# Altium PCB PCB2.PcbDoc
Units mil, origin at the board's own origin, x right, y up, seen from the top; angles counter-clockwise.
Board outline 5000 x 5000 mil, 2 copper layers (Top Layer, Bottom Layer); 97 components, 65 nets, 194 pads, 3 vias.
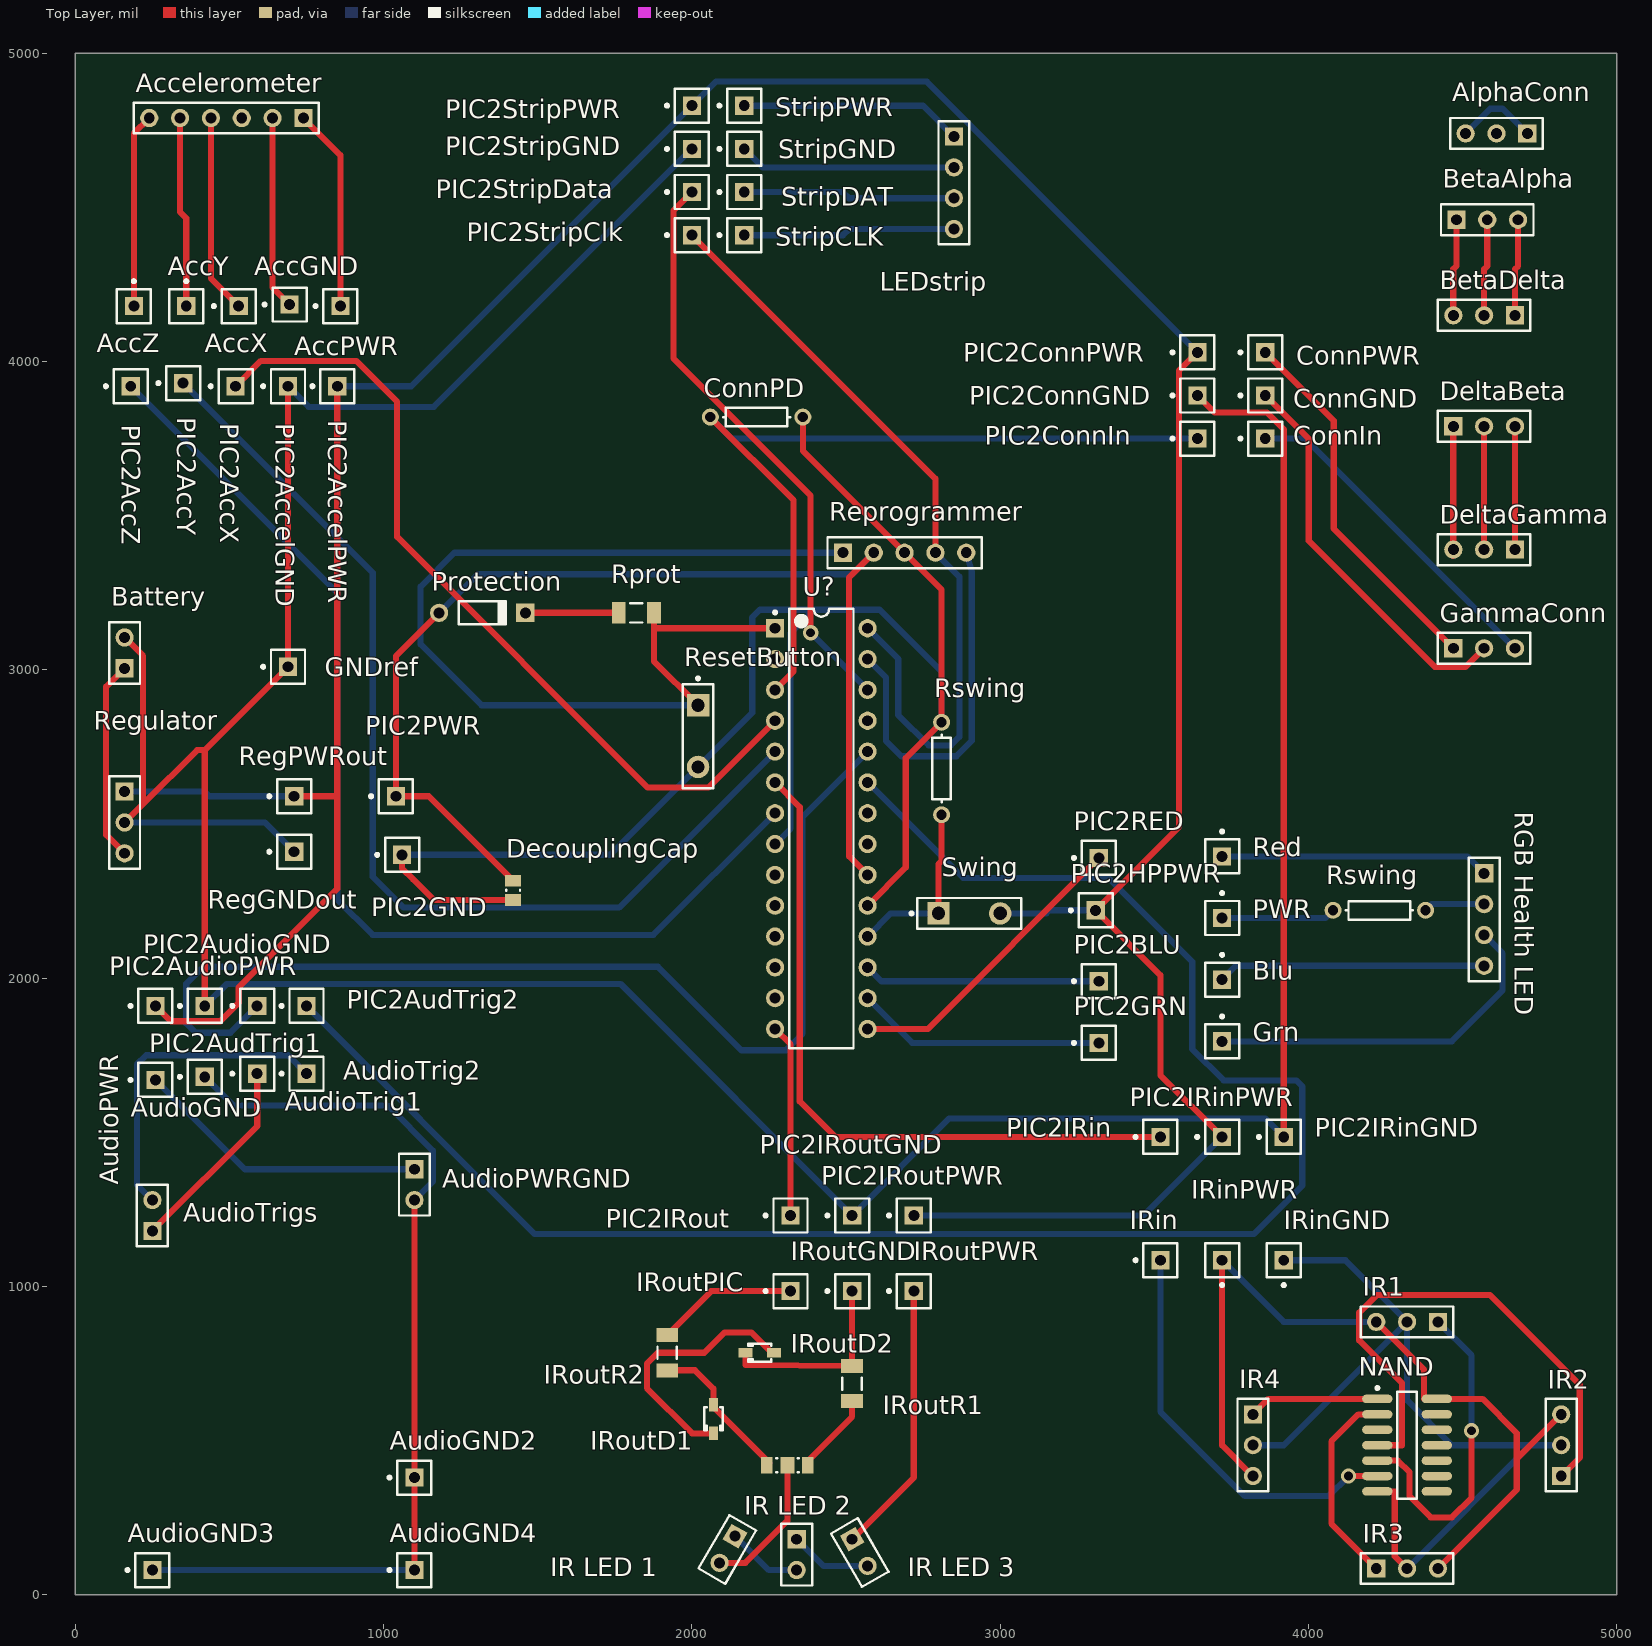
[diagram p0: Top Layer view]
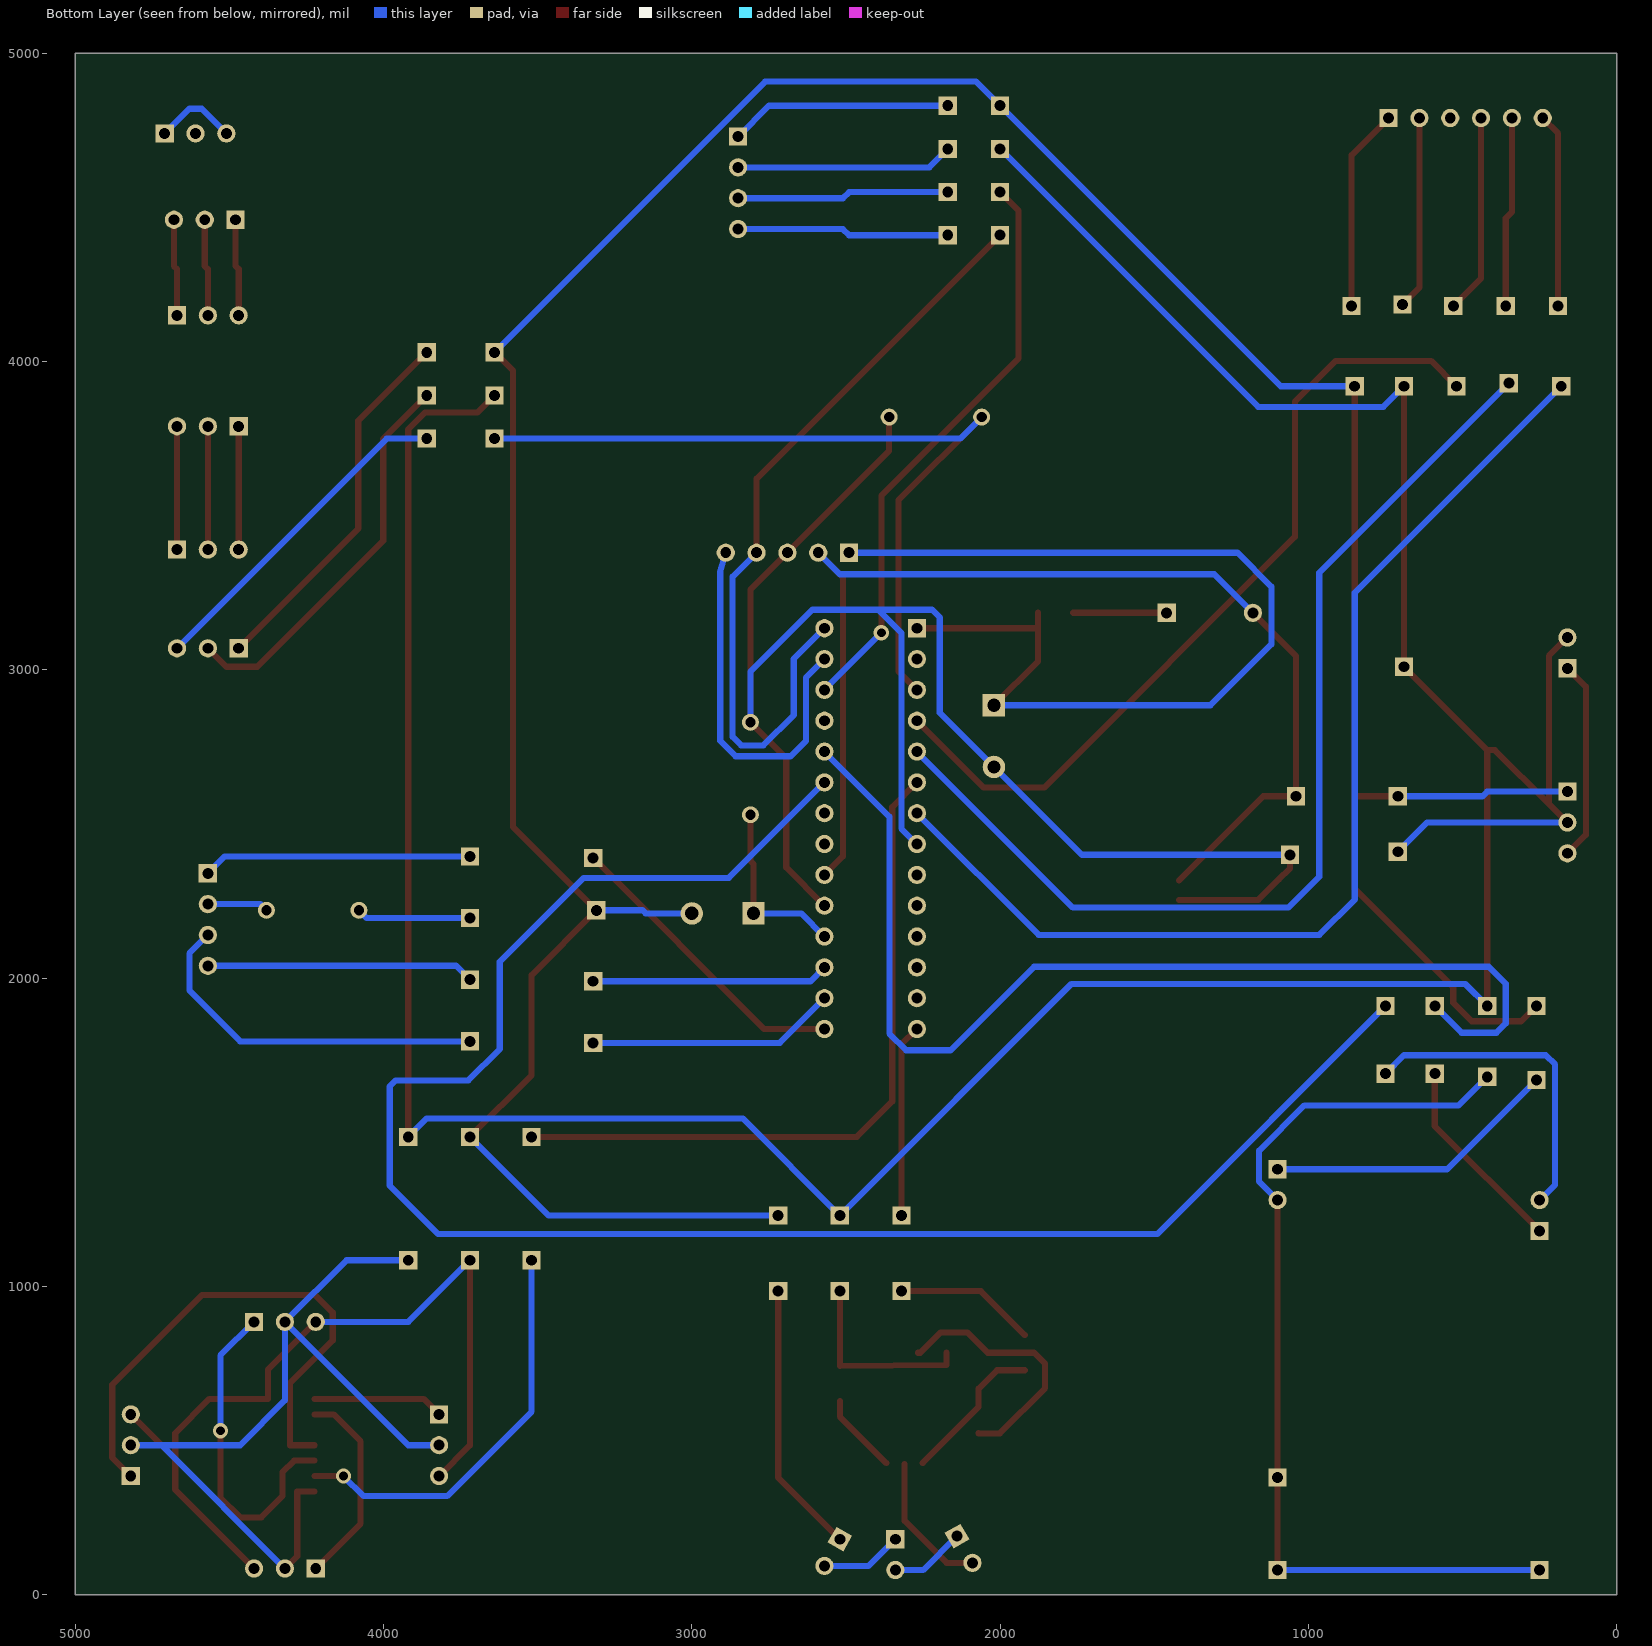
[diagram p1: Bottom Layer view, seen from below]

## Layer stack, top to bottom
Top Solder: solder mask 0.4, Solder Resist, Dk 3.5
Top Layer: signal copper 1.4
Dielectric 1: dielectric 12.6, FR-4, Dk 4.8
Bottom Layer: signal copper 1.4
Bottom Solder: solder mask 0.4, Solder Resist, Dk 3.5

## Board outline
0,0 0,5000 5000,5000 5000,0

## Design rules (kind name [scope] priority, off if disabled: settings)
Clearance [All] p1: gap=10
PolygonConnect [All] p1: connectstyle=Relief reliefconductorwidth=10 reliefentries=4 polygonreliefangle="90 Angle" airgapwidth=10
RoomDefinition Schematic [InComponentClass('Schematic')] p1: confinementstyle=ConfineIn formatcopy=TRUE lockcomponents=FALSE outline -2335,-1800 40290,-1800 40290,-250 -2335,-250
RoutingVias [All] p1: holewidth=28 width=50 viastyle="Through Hole" minholewidth=28 minwidth=50 maxholewidth=28 maxwidth=50
SolderMaskExpansion [All] p1: expansion=4
Width [All] p1: maxlimit=20 minlimit=20 preferedwidth=20
30 further rules are at their usual default settings.

## Components (designator, comment, footprint, x,y, rotation, side; value= is the part's Value field where it differs from the comment)
Accelerometer "Header 6" HDR1X6 740,4790 r180 top
AccGND "Plug" PIN1 695,4185 r90 top
AccPWR "Plug" PIN1 860,4180 r90 top
AccX "Plug" PIN1 530,4180 r90 top
AccY "Plug" PIN1 360,4180 r0 top
AccZ "Plug" PIN1 190,4180 r0 top
AlphaConn "Header 3" HDR1X3 4710,4740 r180 top
AudioGND "Plug" PIN1 420,1680 r90 top
AudioGND2 "Plug" PIN1 1100,380 r90 top
AudioGND3 "Plug" PIN1 250,80 r90 top
AudioGND4 "Plug" PIN1 1100,80 r90 top
AudioPWR "Plug" PIN1 260,1670 r90 top
AudioPWRGND "Header 2" HDR1X2 1100,1380 r270 top
AudioTrig1 "Plug" PIN1 590,1690 r90 top
AudioTrig2 "Plug" PIN1 750,1690 r90 top
AudioTrigs "Header 2" HDR1X2 250,1180 r90 top
Battery "Header 2" HDR1X2 160,3005 r90 top
BetaAlpha "Header 3" HDR1X3 4480,4460 r0 top
BetaDelta "Header 3" HDR1X3 4670,4150 r180 top
Blu "Plug" PIN1 3720,1995 r0 top
ConnGND "Plug" PIN1 3860,3890 r90 top
ConnIn "Plug" PIN1 3860,3750 r90 top
ConnPD "Res1" AXIAL-0.3 2210,3820 r180 top
ConnPWR "Plug" PIN1 3860,4030 r90 top
DecouplingCap "10uf" CAPC0805(2012)75_L 2345,420 r0 top
DecouplingCap "10uf" CAPC0805(2012)75_L 2275,420 r0 top
DecouplingCap "10uf" CAPC0805(2012)75_L 1420,2285 r270 top
DeltaBeta "Header 3" HDR1X3 4470,3790 r0 top
DeltaGamma "Header 3" HDR1X3 4670,3390 r180 top
GammaConn "Header 3" HDR1X3 4470,3070 r0 top
GNDref "Plug" PIN1 690,3010 r90 top
Grn "Plug" PIN1 3720,1795 r0 top
IR1 "Header 3" HDR1X3 4420,885 r180 top
IR2 "Header 3" HDR1X3 4820,385 r90 top
IR3 "Header 3" HDR1X3 4220,85 r0 top
IR4 "Header 3" HDR1X3 3820,585 r270 top
"IR LED 1" "Header 2" HDR1X2 2140,190 r240 top
"IR LED 2" "Header 2" HDR1X2 2340,180 r270 top
"IR LED 3" "Header 2" HDR1X2 2520,180 r300 top
IRin "Plug" PIN1 3520,1085 r90 top
IRinGND "Plug" PIN1 3920,1085 r180 top
IRinPWR "Plug" PIN1 3720,1085 r180 top
IRoutD1 "N4148" DIOD-SOD323-2_V 2070,570 r270 top
IRoutD2 "N4148" DIOD-SOD323-2_V 2220,785 r180 top
IRoutGND "Plug" PIN1 2520,985 r90 top
IRoutPIC "Plug" PIN1 2320,985 r90 top
IRoutPWR "Plug" PIN1 2720,985 r90 top
IRoutR1 "3.3 5% 1206(3216)" RESC1206(3216)_N 2520,685 r270 top
IRoutR2 "7.2K 5% 1206(3216)" RESC1206(3216)_N 1920,785 r90 top
LEDstrip "Header 4" HDR1X4 2850,4730 r270 top
NAND "SN74F20D" D014_M 4320,485 r0 top
PIC2AccelGND "Plug" PIN1 690,3920 r90 top
PIC2AccelPWR "Plug" PIN1 850,3920 r90 top
PIC2AccX "Plug" PIN1 520,3920 r90 top
PIC2AccY "Plug" PIN1 350,3930 r90 top
PIC2AccZ "Plug" PIN1 180,3920 r90 top
PIC2AudioGND "Plug" PIN1 420,1910 r90 top
PIC2AudioPWR "Plug" PIN1 260,1910 r90 top
PIC2AudTrig1 "Plug" PIN1 590,1910 r90 top
PIC2AudTrig2 "Plug" PIN1 750,1910 r90 top
PIC2BLU "Plug" PIN1 3320,1990 r90 top
PIC2ConnGND "Plug" PIN1 3640,3890 r90 top
PIC2ConnIn "Plug" PIN1 3640,3750 r90 top
PIC2ConnPWR "Plug" PIN1 3640,4030 r90 top
PIC2GND "Plug" PIN1 1060,2400 r90 top
PIC2GRN "Plug" PIN1 3320,1790 r90 top
PIC2HPPWR "Plug" PIN1 3310,2220 r90 top
PIC2IRin "Plug" PIN1 3520,1485 r90 top
PIC2IRinGND "Plug" PIN1 3920,1485 r90 top
PIC2IRinPWR "Plug" PIN1 3720,1485 r90 top
PIC2IRout "Plug" PIN1 2320,1230 r90 top
PIC2IRoutGND "Plug" PIN1 2520,1230 r90 top
PIC2IRoutPWR "Plug" PIN1 2720,1230 r90 top
PIC2PWR "Plug" PIN1 1040,2590 r90 top
PIC2RED "Plug" PIN1 3320,2390 r90 top
PIC2StripClk "Plug" PIN1 2000,4410 r90 top
PIC2StripData "Plug" PIN1 2000,4550 r90 top
PIC2StripGND "Plug" PIN1 2000,4690 r90 top
PIC2StripPWR "Plug" PIN1 2000,4830 r90 top
Protection "Diode 1N4148" DO-35 1320,3185 r0 top
PWR "Plug" PIN1 3720,2195 r0 top
Red "Plug" PIN1 3720,2395 r0 top
RegGNDout "Plug" PIN1 710,2410 r90 top
RegPWRout "Plug" PIN1 710,2590 r90 top
Regulator "Header 3" HDR1X3 160,2605 r270 top
Reprogrammer "Header 5" HDR1X5 2490,3380 r0 top
ResetButton "SW-SPST" SPST-2 2020,2785 r270 top
"RGB Health LED" "Header 4" HDR1X4 4570,2340 r270 top
Rprot "1K 5% 1206(3216)" RESC1206(3216)_N 1820,3185 r180 top
Rswing "Res1" AXIAL-0.3 4230,2220 r180 top
Rswing "Res1" AXIAL-0.3 2810,2680 r90 top
StripCLK "Plug" PIN1 2170,4410 r90 top
StripDAT "Plug" PIN1 2170,4550 r90 top
StripGND "Plug" PIN1 2170,4690 r90 top
StripPWR "Plug" PIN1 2170,4830 r90 top
Swing "SW-SPST" SPST-2 2900,2210 r0 top (schematic designator TriggerSwing)
U? "PIC16F1788SP" SPDIP300-SP28 2420,2485 r0 top

## Footprints (in the part's own frame and the unit in brackets; to place one, negate y for a bottom-side part, rotate by r counter-clockwise, add the part's x,y. Pads: shape width x height; smd on the part's side, far side on the other; paste and mask are expansions set on the pad)
AXIAL-0.3 [mm] "Axial Device, Thru-Hole; 2 Leads; 0.3 in Pin Spacing"
  round 1.4 hole 0.85: 1(-3.81,0) 2(3.81,0)
  silkscreen extent -2.77,-0.76 2.77,0.76
CAPC0805(2012)75_L [mm] "Chip Capacitor, Body 2.0x1.2mm, Height 0.75mm, IPC High Density"
  rect 0.95x1.35 smd: 1(-0.8,0) 2(0.8,0)
  silkscreen extent -0.05,-0.58 0.05,0.58, body extent -1.1,-0.72 1.1,0.72, height 0.75
D014_M [mm] "SOIC, 14-Leads, Body 8.7x3.9mm, Pitch 1.27mm, IPC Low Density"
  oval 2.5x0.7 smd: 1(-2.45,3.81) 2(-2.45,2.54) 3(-2.45,1.27) 4(-2.45,0) 5(-2.45,-1.27) 6(-2.45,-2.54) 7(-2.45,-3.81) 8(2.45,-3.81) 9(2.45,-2.54) 10(2.45,-1.27) 11(2.45,0) 12(2.45,1.27) 13(2.45,2.54) 14(2.45,3.81)
  silkscreen extent -2.57,-4.4 0.8,4.83, body extent -2,-4.38 2,4.38, height 1.75
DIOD-SOD323-2_V [mil] "SMT Diode, 2 Leads, Body 1.7 x 1.3 mm"
  rect 45x30 smd: 1(-46.26,0) 2(46.26,0)
  silkscreen extent -37,-30 37,30, body extent -39,-27 38,28, height 43
DO-35 [mm] "Diode, Axial; Body 3.8 x 1.9 mm (LxDia. max), Lead Dia. 0.53 mm (max)"
  round 1.5 hole 0.9: 1(-3.55,0)
  rect 1.5x1.5 hole 0.9: 2(3.55,0)
  silkscreen extent -1.95,-0.95 2.05,0.95
HDR1X2 [mm] "Connector; Header; 2 Position"
  rect 1.5x1.5 hole 0.9: 1(0,0)
  round 1.5 hole 0.9: 2(2.54,0)
  silkscreen extent -1.27,-1.27 3.81,1.27
HDR1X3 [mm] "Connector; Header; 3 Position"
  rect 1.5x1.5 hole 0.9: 1(0,0)
  round 1.5 hole 0.9: 2(2.54,0) 3(5.08,0)
  silkscreen extent -1.27,-1.27 6.35,1.27
HDR1X4 [mm] "Connector; Header; 4 Position"
  rect 1.5x1.5 hole 0.9: 1(0,0)
  round 1.5 hole 0.9: 2(2.54,0) 3(5.08,0) 4(7.62,0)
  silkscreen extent -1.27,-1.27 8.89,1.27
HDR1X5 [mm] "Connector; Header; 5 Position"
  rect 1.5x1.5 hole 0.9: 1(0,0)
  round 1.5 hole 0.9: 2(2.54,0) 3(5.08,0) 4(7.62,0) 5(10.16,0)
  silkscreen extent -1.27,-1.27 11.43,1.27
HDR1X6 [mm] "Connector; Header; 6 Position"
  rect 1.5x1.5 hole 0.9: 1(0,0)
  round 1.5 hole 0.9: 2(2.54,0) 3(5.08,0) 4(7.62,0) 5(10.16,0) 6(12.7,0)
  silkscreen extent -1.27,-1.27 13.97,1.27
PIN1 [mm] "Connector; Plug"
  rect 1.5x1.5 hole 0.9: 1(0,0)
  silkscreen extent -1.4,-1.4 1.4,2.17
RESC1206(3216)_N [mm] "Chip Resistor, Body 3.2x1.6mm, IPC Medium Density"
  rect 1.15x1.8 smd: 1(-1.45,0) 2(1.45,0)
  silkscreen extent -0.5,-0.8 0.5,0.8, body extent -1.67,-0.87 1.67,0.87, height 0.75
SPDIP300-SP28 [mm] "DIP, 28-Leads, Row Spacing 7.62mm, Pitch 2.54mm, Body 34.9x6.8mm"
  rect 1.5x1.5 hole 0.9: 1(-3.81,16.51)
  round 1.5 hole 0.9: 2(-3.81,13.97) 3(-3.81,11.43) 4(-3.81,8.89) 5(-3.81,6.35) 6(-3.81,3.81) 7(-3.81,1.27) 8(-3.81,-1.27) 9(-3.81,-3.81) 10(-3.81,-6.35) 11(-3.81,-8.89) 12(-3.81,-11.43) 13(-3.81,-13.97) 14(-3.81,-16.51) 15(3.81,-16.51) 16(3.81,-13.97) 17(3.81,-11.43) 18(3.81,-8.89) 19(3.81,-6.35) 20(3.81,-3.81) 21(3.81,-1.27) 22(3.81,1.27) 23(3.81,3.81) 24(3.81,6.35) 25(3.81,8.89) 26(3.81,11.43) 27(3.81,13.97) 28(3.81,16.51)
  silkscreen extent -3.93,-18.1 2.65,18.1, body extent -3.55,-18.1 3.55,18.1, height 5.08
SPST-2 [mm] "Switch; 2 Leads"
  rect 1.85x1.85 hole 1.1: 1(-2.54,0)
  round 1.85 hole 1.1: 2(2.54,0)
  silkscreen extent -4.89,-1.27 4.28,1.27

## Part data
Accelerometer: "Header, 6-Pin"
AlphaConn BetaAlpha BetaDelta DeltaBeta DeltaGamma GammaConn IR1 IR2 IR3 IR4 Regulator: "Header, 3-Pin"
AudioPWRGND AudioTrigs Battery "IR LED 1" "IR LED 2" "IR LED 3": "Header, 2-Pin"
ConnPD Rswing Rswing: "Resistor"
DecouplingCap DecouplingCap DecouplingCap: library part CMP-1036-01219-1, "CAP 22pF 16V ±5% 0805 (2012 Metric) Thickness 0.75mm SMD"
IRoutD1 IRoutD2: library part CMP-0303-00001-1, "Schottky Diode, 400mA"
IRoutR1 IRoutR2 Rprot: library part CMP-1014-00074-1, "1K 0.25W 5% 1206 (3216 Metric)  SMD"
LEDstrip "RGB Health LED": "Header, 4-Pin"
NAND: "Dual 4-Input Positive-NAND Gate"
Protection: "High Conductance Fast Diode"
Reprogrammer: "Header, 5-Pin"
ResetButton Swing: "Single-Pole, Single-Throw Switch"
U?: library part PIC16F72-I/SP, "8-Bit CMOS FLASH Microcontroller with A/D Converter, 2K (x14-Bit words) FLASH, 128 Bytes RAM, 28-Pin PDIP 300mil, Standard VDD Range, Industrial Temperature"

## Via types
v1: diameter 50, hole 28, Top Layer to Bottom Layer, 3 vias

## Nets (pads, with @x,y where several pads share a name; then routed paths per layer and width w, separated by ;. In a path a pad name is that pad's centre, name@x,y a point inside that pad or via, vN(x,y) a via of type N, cw(c..) or ccw(c..) an arc to the next point about the centre after c; other vN are vias at no path point)
NetAccelerometer_1: Accelerometer.1 AccPWR.1 | length 659.7
  Top Layer w20: Accelerometer.1 860,4670 AccPWR.1
NetAccelerometer_2: Accelerometer.2 AccGND.1 | length 627.8
  Top Layer w20: Accelerometer.2 640,4240 AccGND.1
NetAccelerometer_4: Accelerometer.4 AccX.1 | length 647.3
  Top Layer w20: Accelerometer.4 440,4270 AccX.1
NetAccelerometer_5: Accelerometer.5 AccY.1 | length 618.3
  Top Layer w20: Accelerometer.5 340,4485 360,4465 AccY.1
NetAccelerometer_6: Accelerometer.6 AccZ.1 | length 630.7
  Top Layer w20: AccZ.1 190,4740 Accelerometer.6
NetAlphaConn_1: AlphaConn.1 AlphaConn.3 | length 266.3
  Bottom Layer w20: AlphaConn.3 4590,4820 4630,4820 AlphaConn.1
NetAudioGND2_1: AudioGND2.1 AudioGND3.1 AudioGND4.1 AudioGND.1 AudioPWRGND.2 | length 3074.3
  Top Layer w20: AudioGND4.1 AudioGND2.1 AudioPWRGND.2
  Bottom Layer w20: AudioGND3.1 AudioGND4.1 ; AudioGND.1 513,1587 1013,1587 1160,1440 1160,1340 AudioPWRGND.2
NetAudioPWR_1: AudioPWR.1 AudioPWRGND.1 | length 960.1
  Bottom Layer w20: AudioPWR.1 550,1380 AudioPWRGND.1
NetAudioTrig1_1: AudioTrig1.1 AudioTrigs.1 | length 650.8
  Top Layer w20: AudioTrigs.1 590,1520 AudioTrig1.1
NetAudioTrig2_1: AudioTrig2.1 AudioTrigs.2 | length 1048
  Bottom Layer w20: AudioTrigs.2 200,1330 200,1720 230,1750 690,1750 AudioTrig2.1
NetBattery_1: Battery.1 Regulator.3 | length 649.7
  Top Layer w20: Regulator.3 100,2465 100,2945 Battery.1
NetBattery_2: Battery.2 GNDref.1 PIC2AccelGND.1 PIC2AudioGND.1 PIC2ConnGND.1 PIC2IRinGND.1 PIC2IRoutGND.1 PIC2StripGND.1 RegGNDout.1 Regulator.2 | length 11934.2
  Top Layer w20: Regulator.2 220,2565 ; Battery.2 220,3045 220,2565 ; PIC2AudioGND.1 420,2740 ; PIC2AccelGND.1 GNDref.1 420,2740 ; PIC2ConnGND.1 3695,3835 3865,3835 3920,3780 PIC2IRinGND.1 ; 220,2565 395,2740 420,2740
  Bottom Layer w20: Regulator.2 615,2505 RegGNDout.1 ; PIC2AudioGND.1 491,1981 1769,1981 PIC2IRoutGND.1 2835,1545 3860,1545 PIC2IRinGND.1 ; PIC2AccelGND.1 757,3853 1163,3853 PIC2StripGND.1
NetBetaAlpha_1: BetaAlpha.1 BetaDelta.3 | length 314.1
  Top Layer w20: BetaDelta.3 4470,4300 4480,4310 BetaAlpha.1
NetBetaAlpha_2: BetaAlpha.2 BetaDelta.2 | length 314.1
  Top Layer w20: BetaDelta.2 4570,4300 4580,4310 BetaAlpha.2
NetBetaAlpha_3: BetaAlpha.3 BetaDelta.1 | length 314.1
  Top Layer w20: BetaDelta.1 4670,4300 4680,4310 BetaAlpha.3
NetBlu_1: "RGB Health LED.4" Blu.1 | length 868.6
  Bottom Layer w20: Blu.1 3765,2040 4570,2040
NetConnGND_1: ConnGND.1 GammaConn.2 | length 1292.7
  Top Layer w20: ConnGND.1 4001,3749 4001,3419 4410,3010 4510,3010 GammaConn.2
NetConnIn_1: ConnIn.1 GammaConn.3 | length 1091.7
  Bottom Layer w20: ConnIn.1 3990,3750 GammaConn.3
NetConnPD_1: ConnPD.1 PIC2GND.1 Reprogrammer.3 ResetButton.2 Rswing.2@2810,2830 U?.8 U?.19 | length 5190.2
  Top Layer w20: ConnPD.1 2360,3710 Reprogrammer.3 2810,3260 2810,2830 2694,2714 2694,2359 U?.19
  Bottom Layer w20: PIC2GND.1 1735,2400 ResetButton.2 2196,2861 2196,3170 2221,3195 2395,3195 ; U?.8 2320,2485 2320,3120 2395,3195 ; Rswing.2@2810,2830 2810,2994.06 2609.06,3195 2395,3195
NetConnPD_2: ConnPD.2 PIC2ConnIn.1 U?.3 | length 2630.7
  Top Layer w20: ConnPD.2 2330,3550 2330,2995 U?.3
  Bottom Layer w20: ConnPD.2 2130,3750 PIC2ConnIn.1
NetConnPWR_1: ConnPWR.1 GammaConn.1 | length 1212.7
  Top Layer w20: ConnPWR.1 4082,3808 4082,3458 GammaConn.1
NetDecouplingCap_1: DecouplingCap.1@1420,2316.5 PIC2PWR.1 Protection.1 Reprogrammer.2 U?.20 | length 3739.9
  Top Layer w20: Protection.1 1040,3044.76 PIC2PWR.1 1146.5,2590 DecouplingCap.1@1420,2316.5 ; U?.20 2510,2395 2510,3300 Reprogrammer.2
  Bottom Layer w20: Protection.1 1305.24,3310 2520,3310 Reprogrammer.2
NetDeltaBeta_2: DeltaBeta.2 DeltaGamma.2 | length 400
  Top Layer w20: DeltaGamma.2 DeltaBeta.2
NetDeltaBeta_3: DeltaBeta.3 DeltaGamma.1 | length 400
  Top Layer w20: DeltaGamma.1 DeltaBeta.3
NetGrn_1: "RGB Health LED.3" Grn.1 | length 1183.2
  Bottom Layer w20: Grn.1 4465,1795 4630,1960 4630,2080 4570,2140
NetIR1_1: IR1.1 NAND.5 | length 1068.4
  Top Layer w20: NAND.5 4290,435 4328,397 4328,320 4397,251 4465,251 4529,315 v1(4529,532)
  Bottom Layer w20: IR1.1 4529,776 v1(4529,532)
NetIR1_2: IR1.2 IR2.2 IR3.2 IR4.2 IRinGND.1 NAND.7 | length 2852.3
  Top Layer w20: NAND.7 4280,335 4280,125 IR3.2
  Bottom Layer w20: IR4.2 3920,485 IR1.2 ; IRinGND.1 4120,1085 IR1.2 ; IR3.2 4720,485 ; IR2.2 4720,485 ; IR1.2 4320,630 4465,485 4720,485
NetIR1_3: IR1.3 IR2.3 IR3.3 IR4.3 IRinPWR.1 NAND.14 | length 2734
  Top Layer w20: IRinPWR.1 3720,485 IR4.3 ; IR1.3 4375.27,729.73 4375.27,635 NAND.14 4565,635 4676,524 4676,441 ; IR3.3 4676,341 4676,441 ; IR2.3 4676,441
  Bottom Layer w20: IRinPWR.1 3920,885 IR1.3
NetIR2_1: IR2.1 NAND.4 | length 1746.6
  Top Layer w20: NAND.4 4303,485 4303,687 4165,825 4165,915 4222,972 4589,972 4880,681 4880,445 IR2.1
NetIR3_1: IR3.1 NAND.2 | length 658.2
  Top Layer w20: IR3.1 4074.33,230.67 4074.33,497.33 4162,585 NAND.2
NetIR4_1: IR4.1 NAND.1 | length 424.3
  Top Layer w20: IR4.1 3870,635 NAND.1
"NetIR LED 1_1": "IR LED 1.1" "IR LED 2.2" | length 245.6
  Bottom Layer w20: 2140,190 2250,80 2340,80
"NetIR LED 1_2": "IR LED 1.2" DecouplingCap.1@2313.5,420 DecouplingCap.2@2306.5,420 | length 459.7
  Top Layer w20: 2090,103.4 2173.4,103.4 2310,240 DecouplingCap.1@2310,423.07
"NetIR LED 2_1": "IR LED 2.1" "IR LED 3.2" | length 265.9
  Bottom Layer w20: 2340,180 2426.6,93.4 2570,93.4
"NetIR LED 3_1": "IR LED 3.1" IRoutPWR.1 | length 887.8
  Top Layer w20: 2520,180 2720,380 IRoutPWR.1
NetIRin_1: IRin.1 NAND.6 | length 1335
  Top Layer w20: v1(4130,385) NAND.6
  Bottom Layer w20: IRin.1 3520,594 3794,320 4065,320 v1(4130,385)
NetIRoutD1_1: DecouplingCap.1@2243.5,420 IRoutD1.1 IRoutR2.1 | length 492.2
  Top Layer w20: IRoutR2.1 2010.09,727.91 2070,668 IRoutD1.1 2070,609 2251.99,427.01 DecouplingCap.1@2250.94,427.01
NetIRoutD1_2: IRoutD1.2 IRoutD2.1 | length 838.5
  Top Layer w20: IRoutD1.2 2070,523 2001,523 1854,670 1854,749 1890,785 2040,785 2106,851 2193,851 2259,785 IRoutD2.1
NetIRoutD2_2: IRoutD2.2 IRoutGND.1 IRoutR1.1 | length 629.2
  Top Layer w20: IRoutD2.2 2173.74,745 IRoutR1.1 IRoutGND.1
NetIRoutPIC_1: IRoutPIC.1 IRoutR2.2 | length 459.2
  Top Layer w20: IRoutR2.2 2062.91,985 IRoutPIC.1
NetIRoutR1_2: DecouplingCap.2@2376.5,420 IRoutR1.2 | length 263.4
  Top Layer w20: DecouplingCap.2@2369.06,427.01 2520,577.95 IRoutR1.2
NetLEDstrip_1: LEDstrip.1 StripPWR.1 | length 721.4
  Bottom Layer w20: StripPWR.1 2750,4830 LEDstrip.1
NetLEDstrip_2: LEDstrip.2 StripGND.1 | length 704.9
  Bottom Layer w20: StripGND.1 2230,4630 LEDstrip.2
NetLEDstrip_3: LEDstrip.3 StripDAT.1 | length 688.3
  Bottom Layer w20: StripDAT.1 2490,4550 2510,4530 LEDstrip.3
NetLEDstrip_4: LEDstrip.4 StripCLK.1 | length 688.3
  Bottom Layer w20: StripCLK.1 2490,4410 2510,4430 LEDstrip.4
NetPIC2AccelPWR_1: PIC2AccelPWR.1 PIC2AudioPWR.1 PIC2ConnPWR.1 PIC2HPPWR.1 PIC2IRinPWR.1 PIC2IRoutPWR.1 PIC2StripPWR.1 RegPWRout.1 Regulator.1 Swing.2 | length 10968.5
  Top Layer w20: PIC2AudioPWR.1 310,1860 470,1860 530,1920 530,1970 850,2290 PIC2AccelPWR.1 ; RegPWRout.1 840,2590 ; PIC2ConnPWR.1 3580,3970 3580,2490 PIC2HPPWR.1 3520,2010 3520,1685 PIC2IRinPWR.1
  Bottom Layer w20: Regulator.1 420,2605 435,2590 RegPWRout.1 ; PIC2AccelPWR.1 1090,3920 PIC2StripPWR.1 2078,4908 2762,4908 PIC2ConnPWR.1 ; PIC2IRoutPWR.1 3465,1230 PIC2IRinPWR.1 ; Swing.2 3150,2210 3160,2220 PIC2HPPWR.1
NetPIC2AccX_1: PIC2AccX.1 U?.4 | length 2704.3
  Top Layer w20: PIC2AccX.1 602,4002 912,4002 1044,3870 1044,3431 1857,2618 2053,2618 U?.4
NetPIC2AccY_1: PIC2AccY.1 U?.5 | length 3411.8
  Bottom Layer w20: PIC2AccY.1 965,3315 965,2329 1065,2229 1764,2229 U?.5
NetPIC2AccZ_1: PIC2AccZ.1 U?.7 | length 3573.8
  Bottom Layer w20: PIC2AccZ.1 850,3250 850,2255 965,2140 1875,2140 U?.7
NetPIC2AudTrig1_1: PIC2AudTrig1.1 U?.24 | length 3566.3
  Bottom Layer w20: PIC2AudTrig1.1 503,1823 390,1823 360,1853 360,1982 415,2037 1890,2037 2161,1766 2305,1766 2359,1820 2359,2524 U?.24
NetPIC2AudTrig2_1: PIC2AudTrig2.1 U?.23 | length 5907.7
  Bottom Layer w20: PIC2AudTrig2.1 1490,1170 3823,1170 3980,1327 3980,1649 3961,1668 3725,1668 3623,1770 3623,2053 3351,2325 2880,2325 U?.23
NetPIC2BLU_1: PIC2BLU.1 U?.17 | length 768.6
  Bottom Layer w20: U?.17 2615,1990 PIC2BLU.1
NetPIC2GRN_1: PIC2GRN.1 U?.16 | length 810.1
  Bottom Layer w20: U?.16 2715,1790 PIC2GRN.1
NetPIC2IRin_1: PIC2IRin.1 U?.6 | length 2285.8
  Top Layer w20: U?.6 2350,2555 2350,1600 2465,1485 PIC2IRin.1
NetPIC2IRout_1: PIC2IRout.1 U?.14 | length 625.7
  Top Layer w20: U?.14 2320,1785 PIC2IRout.1
NetPIC2RED_1: PIC2RED.1 U?.15 | length 979.9
  Top Layer w20: U?.15 2765,1835 PIC2RED.1
NetPIC2StripClk_1: PIC2StripClk.1 Reprogrammer.4 U?.28 | length 2560.1
  Top Layer w20: PIC2StripClk.1 2790,3620 Reprogrammer.4
  Bottom Layer w20: U?.28 2669.53,3035.47 2669.53,2853.47 2768,2755 2840,2755 2868,2783 2868,3302 Reprogrammer.4
NetPIC2StripData_1: PIC2StripData.1 U?.26 | length 1900.8
  Top Layer w20: PIC2StripData.1 1940,4490 1940,4010 2385,3565 v1(2385,3120)
  Bottom Layer w20: v1(2385,3120) U?.26
NetProtection_2: Protection.2 Rprot.2 | length 303.1
  Top Layer w20: Protection.2 Rprot.2
NetPWR_1: PWR.1 Rswing.2@4080,2220 | length 370.4
  Bottom Layer w20: PWR.1 4055,2195 Rswing.2@4080,2220
NetRed_1: "RGB Health LED.1" Red.1 | length 872.8
  Bottom Layer w20: Red.1 4515,2395 4570,2340
NetReprogrammer_1: Reprogrammer.1 ResetButton.1 Rprot.1 U?.1 | length 3336.7
  Top Layer w20: Rprot.1 1877.09,3135 ; ResetButton.1 1877.09,3027.91 1877.09,3135 ; U?.1 1877.09,3135
  Bottom Layer w20: ResetButton.1 1318,2885 1120,3083 1120,3270 1230,3380 Reprogrammer.1
NetReprogrammer_5: Reprogrammer.5 U?.27 | length 1222.1
  Bottom Layer w20: U?.27 2629.53,2975.47 2629.53,2770 2679.53,2720 2858,2720 2908,2770 2908,3317 Reprogrammer.5
"NetRGB Health LED_2": "RGB Health LED.2" Rswing.1@4380,2220 | length 198.3
  Bottom Layer w20: Rswing.1@4380,2220 4400,2240 4570,2240
NetRswing_1: Rswing.1@2810,2530 Swing.1 U?.18 | length 585.2
  Top Layer w20: Swing.1 2800,2370 2810,2380 Rswing.1@2810,2530
  Bottom Layer w20: U?.18 2645,2210 Swing.1
pads on no net: Accelerometer.3 AlphaConn.2 DecouplingCap.2@1420,2253.5 DeltaBeta.1 DeltaGamma.3 NAND.3 NAND.8 NAND.9 NAND.10 NAND.11 NAND.12 NAND.13 U?.2 U?.9 U?.10 U?.11 U?.12 U?.13 U?.21 U?.22 U?.25
copper on no net: | length 876.8
  Top Layer w20: 1060,2410 1060,2355.47 1095.47,2320 1161.97,2253.5 1420,2253.5 ; 4470,3370 4470,3790

## Silkscreen, mask and mechanical layers (free items; w line width, h text height)
Mechanical 1:
  the board outline again, w10